# Altium PCB AC-DC Power supply-V1.0.PcbDoc
Units mm, origin at the board's own origin, x right, y up, seen from the top; angles counter-clockwise.
Board outline 162 x 54 mm, 2 copper layers (Top Layer, Bottom Layer); 12 components, 6 nets, 32 pads, 0 vias.
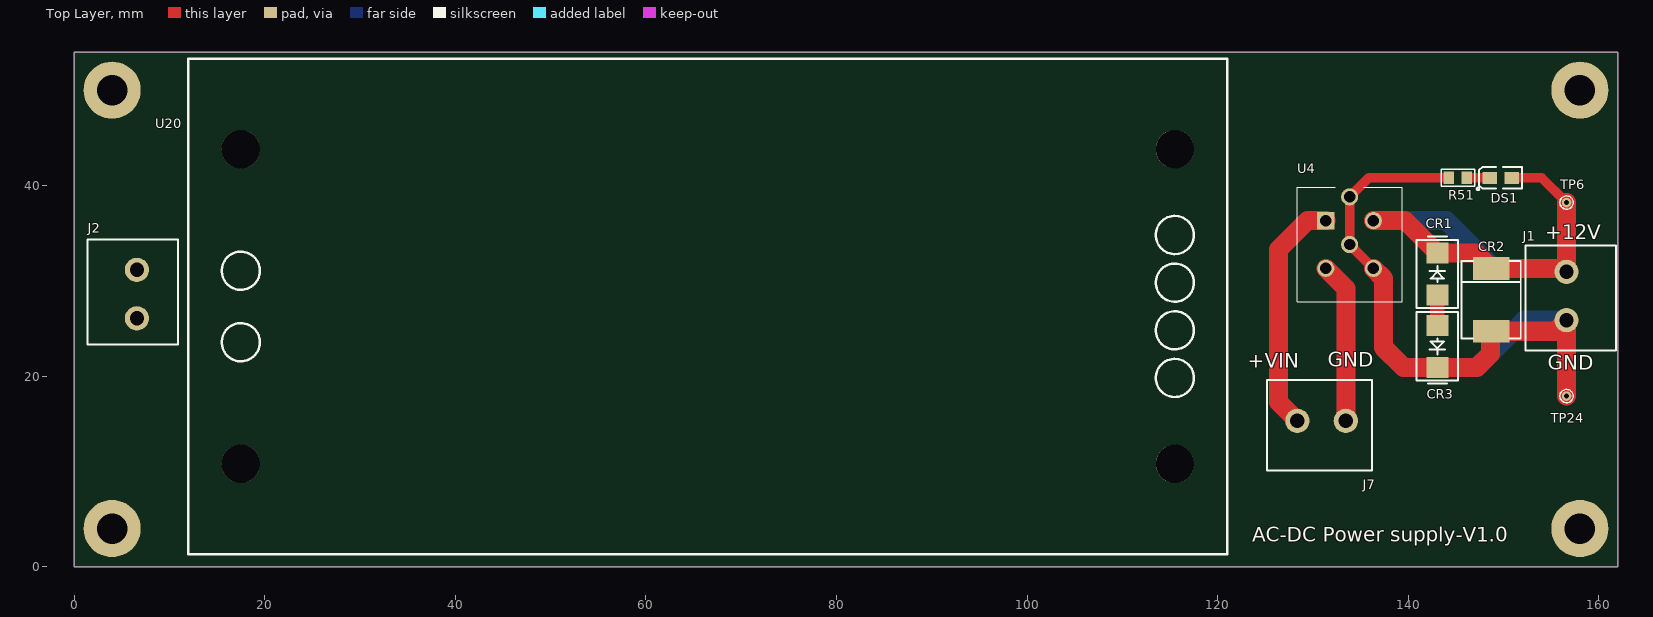
[diagram p0: Top Layer view]
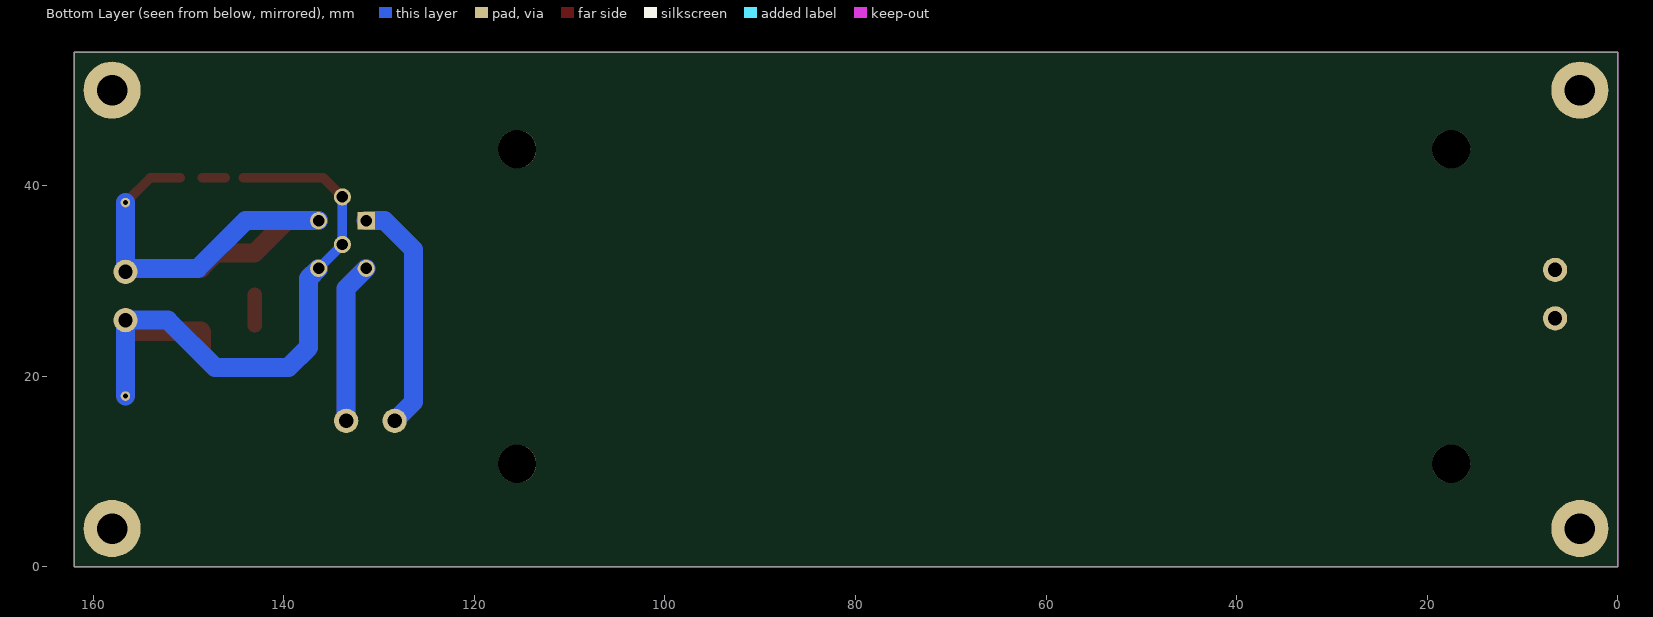
[diagram p1: Bottom Layer view, seen from below]
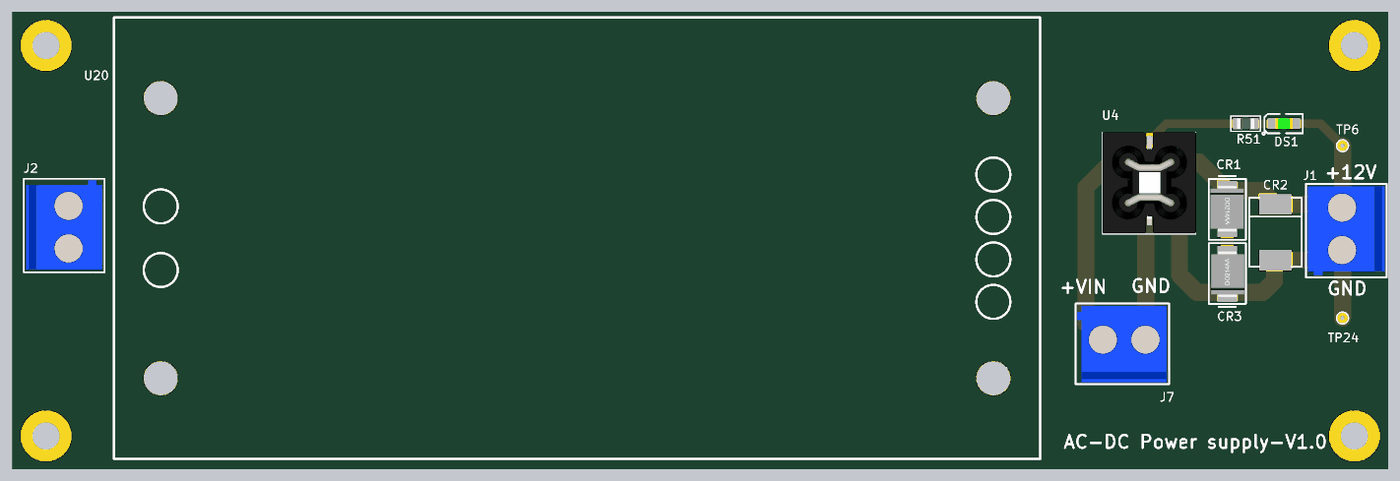
[diagram p2: 3D render of the assembled board from above, using the file's embedded part models]

## Layer stack, top to bottom
Top Solder: solder mask 0.0102, Solder Resist, Dk 3.5
Top Layer: signal copper 0.0356
Dielectric 1: dielectric 0.32, FR-4, Dk 4.8
Bottom Layer: signal copper 0.0356
Bottom Solder: solder mask 0.0102, Solder Resist, Dk 3.5

## Board outline
0,0 0,54 162,54 162,0

## Design rules (kind name [scope] priority, off if disabled: settings)
Clearance [All] p1: gap=0.254 ignorepadtopadclearanceinfootprint=FALSE except(0: Arc-Hole Track-Hole SMDPad-Hole THPad-Hole Via-Hole Fill-Hole Poly-Hole Region-Hole Text-Hole)
HoleSize [All] p1: absolutevalues=TRUE maxlimit=4.2 minlimit=0.025 maxpercent=80.000 minpercent=20.000
PolygonConnect [All] p1: connectstyle=Relief reliefconductorwidth=0.254 reliefentries=4 polygonreliefangle="90 Angle" airgapwidth=0.254
RoutingVias [All] p1: holewidth=0.711 width=1.27 viastyle="Through Hole" minholewidth=0.711 minwidth=1.27 maxholewidth=0.711 maxwidth=1.27
SolderMaskExpansion [All] p1: expansion=0.102 istentingtop=FALSE
Width [All] p1: maxlimit=2 minlimit=0.254 preferedwidth=1
29 further rules are at their usual default settings.

## Components (designator, comment, footprint, x,y, rotation, side; value= is the part's Value field where it differs from the comment)
CR1 "SMBJ48A" "SMB (DO-214AA)" 143.042,30.724 r90 top
CR2 "B540C-13-F" "SMC (DO-214AB)" 148.7,28 r90 top
CR3 "SMBJ48A" "SMB (DO-214AA)" 143.042,23.104 r270 top
DS1 "LED SMD" LED0805 149.7,40.8 r180 top
J1 "691101710002" 691101710002 156.6,28.4 r270 top
J2 "691101710002" 691101710002 6.6,28.6 r90 top
J7 "691101710002" 691101710002 130.9,15.3 r180 top
R51 "15K" R0805 145.203,40.8 r180 top
TP6 "Pad" TP-0.5mm 156.6,38.2 r90 top
TP24 "Pad" TP-0.5mm 156.6,17.9 r90 top
U4 "BNX016-01" BNX016 131.34,36.3 r90 top
U20 "IRM-60-12ST" IRM-60-12ST 12,53.3 r0 top

## Footprints (in the part's own frame and the unit in brackets; to place one, negate y for a bottom-side part, rotate by r counter-clockwise, add the part's x,y. Pads: shape width x height; smd on the part's side, far side on the other; paste and mask are expansions set on the pad)
691101710002 [mm]
  round 2.54 hole 1.5 mask+0.15: 1(-2.54,0) 2(2.54,0)
  silkscreen extent -5.3,-4.3 5.72,5.2, body extent -5,-4.05 5.5,4.95, height 12.5
BNX016 [mm]
  rect 1.8x1.8 hole 1.2: 1(0,0)
  round 1.8 hole 1.2: 2(0,-5) 3(-5,0) 4(-5,-5) 5(-2.5,-2.5) 6(2.5,-2.5)
  silkscreen extent -8.5,-8 3.5,3, body extent -8.44,-8.04 3.56,2.96, height 8
IRM-60-12ST [mm]
  round 4 hole 4: 0(5.5,-42.5) 0(5.5,-9.5) 0(103.5,-42.5) 0(103.5,-9.5)
  silkscreen extent 0,-52 109,0
LED0805 [mil] "LED-0805"
  rect 60x50 smd: 1(-45.28,0) 2(45.28,0)
  silkscreen extent -88,-45 100,52, body extent -40,-25 40,25, height 43
R0805 [mm] "0805"
  rect 1.1x1.35 smd: 1(-0.953,0) 2(0.953,0)
  silkscreen extent -1.75,-0.9 1.75,0.9, body extent -1,-0.63 1,0.63, height 0.47
"SMB (DO-214AA)" [mm]
  rect 2.2x2.3 smd: 1(-2.2,0) 2(2.2,0)
  silkscreen extent -3.6,-2.18 3.91,2.18, body extent -2.74,-1.94 2.85,2.01, height 2.6
"SMC (DO-214AB)" [mm] "SMC-DIODE"
  rect 2.4x3.81 smd: A(-3.3,0) K(3.3,0)
  silkscreen extent -4.06,-3.1 4.06,3.1
TP-0.5mm [mm]
  round 1 hole 0.5: 1(0,0)
  silkscreen extent -0.7,-0.7 0.7,0.7

## Part data
CR1 CR3: library part DiodeSMD4.5mm
CR2: library part DiodeSMD5.5mm
J1 J2 J7: "WR-TBL Series 101 Horizontal Entry Modular, THT, pitch 5mm, 2p", Manufacturer="Wurth Elektronik", Operating Temperature Max=105°C, Operating Temperature Min=-40°C, Rated Current=16A, Working Voltage=250V, Application="Pressure Clamp", Category="Terminal Blocks", ComponentLink1Description="Website Link", ComponentLink1URL=https://www.we-online.com/redexpert/article/691101710002?ad, ComponentLink2Description="Datasheet Link", ComponentLink2URL=https://www.we-online.com/redexpert/spec/691101710002?ad, Manufacturer Part Number=691101710002, Match Code=WR-TBL, Modularity=Yes, Mount="Through Hole", Number of Pins=2, Number of Rows=1, Orientation=Horizontal, Packaging=Box, Pitch=5mm
R51: library part ResSMD
TP6 TP24: library part "Con1 pin-Small"
U4: library part BNX016

## Free pads (board coordinates)
  round 6 hole 3.2: 0(4,4) 0(4,50) 0(158,4) 0(158,50)

## Nets (pads, with @x,y where several pads share a name; then routed paths per layer and width w, separated by ;. In a path a pad name is that pad's centre, name@x,y a point inside that pad or via, vN(x,y) a via of type N, cw(c..) or ccw(c..) an arc to the next point about the centre after c; other vN are vias at no path point)
"+12V_Digital IN": CR1.2 CR2.K DS1.1 J1.1 TP6.1 U4.2 | length 66.3
  Top Layer w1: DS1.1 154,40.8 TP6.1
  Top Layer w2: U4.2 139.666,36.3 CR1.2 147.076,32.924 CR2.K 156.24,31.3 J1.1 TP6.1
  Bottom Layer w2: U4.2 144,36.3 149,31.3 156.24,31.3 J1.1 TP6.1
GND_IN: CR2.A CR3.2 J1.2 R51.2 TP24.1 U4.4 U4.5 U4.6 | length 107.3
  Top Layer w1: U4.4 U4.5 U4.6 135.84,40.8 R51.2
  Top Layer w2: U4.4 137.4,30.24 137.4,23 139.496,20.904 CR3.2 147.204,20.904 148.6,22.3 148.6,24.6 CR2.A 155.44,24.7 J1.2 TP24.1
  Bottom Layer w1: U4.6 U4.5 U4.4
  Bottom Layer w2: U4.4 137.4,30.24 137.4,23 139.496,20.904 147.204,20.904 152.16,25.86 J1.2 TP24.1
NetCR1_1: CR1.1 CR3.1 | length 3.2
  Top Layer w1.5: CR3.1 CR1.1
NetDS1_2: DS1.2 R51.1 | length 2.4
  Top Layer w1: R51.1 DS1.2
NetJ7_1: J7.1 U4.3 | length 33.7
  Top Layer w2: U4.3 133.44,29.2 J7.1
  Bottom Layer w2: U4.3 133.44,29.2 J7.1
NetJ7_2: J7.2 U4.1 | length 50
  Top Layer w2: J7.2 126.4,17.26 126.4,33.3 129.4,36.3 U4.1
  Bottom Layer w2: J7.2 126.4,17.26 126.4,33.3 129.4,36.3 U4.1
pads on no net: J2.1 J2.2 U20.0

## Keep-outs
Keep-Out Layer:
  the board outline again, w0.152

## Silkscreen, mask and mechanical layers (free items; w line width, h text height)
Top Overlay:
  text "+12V" at 154.354,34.354 h1.52
  text "GND" at 131.554,20.954 h1.52
  text "+VIN" at 123.154,20.854 h1.52
  text "GND" at 154.654,20.654 h1.52
  text "AC-DC Power supply-V1.0" at 123.623,2.593 h1.52